# EAGLE board OOBDROID_V1 (EAGLE 7.2.0)

Size 60.3 x 36.38 mm. Coordinates in mm from the lower left corner, seen from the top.
Outline: 0.01,0.05 60.3,0 60.3,36.38 0,36.38
Copper layers (1*16): Top 0.035mm / dielectric 1.5mm / Bottom 0.035mm
Design rules "default": minimum track width 10mil, minimum drill 24mil, track to track 8mil, track to pad 8mil, pad to pad 8mil, via to via 8mil, smd to smd 8mil, copper to edge 40mil, drill to drill 8mil, minimum pad ring 10mil, minimum via ring 8mil, stop-mask expansion 4mil, vias tented up to drill 0mil, thermal gap 10mil

## Footprints (pad centres in the part's own frame; a part is rotated, then mirrored left to right if it is on the bottom)
C0805 = smd 1.3 x 1.5: 1 -0.95,0; 2 0.95,0
E1,8-4 = drill 0.711 pad 1.168: + -0.889,0 | drill 0.711 pad 1.168 octagon: - 0.889,0
DO214AA = smd 1.8 x 2.2: A 2.55,0; C -2.55,0
L4532P = smd 1.8 x 3.6: 1 -2,0; 2 2,0
DUOLED-C-5MM = drill 0.813 long: AR 2.54,0; AX -2.54,0; C 0,0
LED5MM = drill 0.813 pad 1.676 octagon: A -1.27,0; K 1.27,0
SSW-106-02-S-D = drill 1 pad 1.5 octagon: 1 -6.35,-1.27; 2 -6.35,1.27; 3 -3.81,-1.27; 4 -3.81,1.27; 5 -1.27,-1.27; 6 -1.27,1.27; 7 1.27,-1.27; 8 1.27,1.27; 9 3.81,-1.27; 10 3.81,1.27; 11 6.35,-1.27; 12 6.35,1.27
R0603 = smd 1 x 1.1: 1 -0.85,0; 2 0.85,0
SMT-0540-S-R = smd 1 x 1: + 1.7,-2.7; - 1.7,2.7; M -1.7,-2.7
TO263-5 = smd 1.067 x 2.159: 1 -3.404,-5.791; 2 -1.702,-5.791; 3 0,-5.791; 4 1.702,-5.791; 5 3.404,-5.791 | smd 10.8 x 10.41: 6 0,2.54
SOT23 = smd 1 x 1.4: 1 -0.95,-1.1; 2 0.95,-1.1; 3 0,1.1
SO08 = smd 0.61 x 2.21: 1 -1.905,-2.616; 2 -0.635,-2.616; 3 0.635,-2.616; 4 1.905,-2.616; 5 1.905,2.616; 6 0.635,2.616; 7 -0.635,2.616; 8 -1.905,2.616
SO18L = smd 0.66 x 2.032: 1 -5.08,-4.902; 2 -3.81,-4.902; 3 -2.54,-4.902; 4 -1.27,-4.902; 5 0,-4.902; 6 1.27,-4.902; 7 2.54,-4.902; 8 3.81,-4.902; 9 5.08,-4.902; 10 5.08,4.902; 11 3.81,4.902; 12 2.54,4.902; 13 1.27,4.902; 14 0,4.902; 15 -1.27,4.902; 16 -2.54,4.902; 17 -3.81,4.902; 18 -5.08,4.902
USB-A003 = smd 1.12 x 4: 1 -3.5,14; 2 -1,14; 3 1,14; 4 3.5,14 | hole 2.3: -6.57,10.28; 6.57,10.28
HC49 = drill 0.813 pad 1.8: 1 -2.413,0; 2 2.413,0
SSW-113-02-S-D = drill 1 pad 1.5 octagon: 1 -15.24,-1.27; 2 -15.24,1.27; 3 -12.7,-1.27; 4 -12.7,1.27; 5 -10.16,-1.27; 6 -10.16,1.27; 7 -7.62,-1.27; 8 -7.62,1.27; 9 -5.08,-1.27; 10 -5.08,1.27; 11 -2.54,-1.27; 12 -2.54,1.27; 13 0,-1.27; 14 0,1.27; 15 2.54,-1.27; 16 2.54,1.27; 17 5.08,-1.27; 18 5.08,1.27; 19 7.62,-1.27; 20 7.62,1.27; 21 10.16,-1.27; 22 10.16,1.27; 23 12.7,-1.27; 24 12.7,1.27; 25 15.24,-1.27; 26 15.24,1.27
SSW-120-02-S-S = drill 1 pad 1.5 octagon: 1 -24.13,0; 2 -21.59,0; 3 -19.05,0; 4 -16.51,0; 5 -13.97,0; 6 -11.43,0; 7 -8.89,0; 8 -6.35,0; 9 -3.81,0; 10 -1.27,0; 11 1.27,0; 12 3.81,0; 13 6.35,0; 14 8.89,0; 15 11.43,0; 16 13.97,0; 17 16.51,0; 18 19.05,0; 19 21.59,0; 20 24.13,0

## Placement (x,y rotation side)
C1  100nF  [C0805]  30.74,4.37 0 top
C2  100nF  [C0805]  30.74,6.91 0 top
C3  22pF  [C0805]  40.39,4.37 180 top
C4  22pF  [C0805]  35.57,4.37 0 top
C5  100nF  [C0805]  35.57,9.45 0 top
C6  100nF  [C0805]  40.39,9.45 180 top
C7  22pF  [C0805]  30.74,9.45 0 top
C8  22pF  [C0805]  35.57,6.91 0 top
C9  220µF  [E1,8-4]  35.31,14.79 270 top
C10  680µF  [E1,8-4]  40.14,14.79 270 top
D1  1N5824  [DO214AA]  55.13,5.9 180 top
L1  33µH  [L4532P]  47,5.9 180 top
LD2  [DUOLED-C-5MM]  3.82,32.82 90 top
LED_BLUE  [LED5MM]  3.82,25.45 0 top
OBD  OOBD-CON  [SSW-106-02-S-D]  57.67,17.07 90 top
R1  120R  [R0603]  23.12,14.79 270 top
R2  10k  [R0603]  20.84,14.79 270 top
R3  120R  [R0603]  18.55,14.79 90 top
R4  4k7  [R0603]  29.47,14.79 90 top
R5  10k  [R0603]  27.44,14.79 270 top
R6  82R  [R0603]  31.5,14.79 270 top
R7  82R  [R0603]  25.41,14.79 270 top
R8  4k7  [R0603]  8.9,28.5 0 top
R9  4k7  [R0603]  8.9,24.95 0 top
SPK1  SMT-0540-S-R  [SMT-0540-S-R]  3.82,4.63 0 top
STEPDOWN  LM2596S  [TO263-5]  49.03,15.8 0 top
T1  BC847  [SOT23]  13.22,28.25 90 top
T2  BC817  [SOT23]  13.22,24.44 90 top
U1  MCP2551  [SO08]  19.06,7.17 0 top
U2  MCP2551  [SO08]  24.9,7.17 180 top
U$1  MCP2515SO  [SO18L]  36.33,24.44 0 top
U$2  MCP2515SO  [SO18L]  22.11,24.44 0 top
USB1  [USB-A003]  0.01,14.79 270 top
X1  16MHz  [HC49]  52.59,33.33 180 top
X2  ODROID P1  [SSW-113-02-S-D]  25.41,33.84 0 top
X3  16MHz  [HC49]  52.59,27.99 0 top
X4  ODROID-P5  [SSW-120-02-S-S]  34.3,1.32 0 top

## Library data of the parts
C1-C8 = eagle-ltspice; SPICEMODEL: NONE; SPICEPREFIX: C
C9 C10 = resistor
D1 = diode
L1 = eagle-ltspice; SPICEMODEL: NONE; SPICEPREFIX: L
LD2 = led
LED_BLUE SPK1 = adafruit
OBD = con-samtec; MPN: SSW-106-02-S-D; OC_FARNELL: unknown; OC_NEWARK: 11P9414
R1-R9 = eagle-ltspice; SPICEMODEL: NONE; SPICEPREFIX: R
STEPDOWN = national-semiconductor; MF: NATIONAL SEMICONDUCTOR; MPN: LM2596S-ADJ/NOPB; OC_FARNELL: 9494367; OC_NEWARK: 41K3842
T1 T2 = transistor
U1 U2 = SparkFun
U$1 U$2 = MCP2515_MT
USB1 = con-yamaichi; OC_FARNELL: unknown; OC_NEWARK: unknown
X1 X3 = IQD-Frequency-Products
X2 = con-samtec; MPN: SSW-113-02-S-D; OC_FARNELL: unknown; OC_NEWARK: 11P9530
X4 = con-samtec; MPN: SSW-120-02-S-S; OC_FARNELL: unknown; OC_NEWARK: 11P9641

## Nets
GND: C1.2 C2.2 C3.1 C4.1 C5.2 C6.2 C7.1 C8.1 C9.- C10.- D1.A LD2.C OBD.4 STEPDOWN.3 STEPDOWN.5 T1.2 T2.2 U1.2 U1.8 U2.2 U2.8 U$1.9 U$2.9
N$1: OBD.5 R1.1 U1.7
N$2: D1.C L1.1 STEPDOWN.2
N$3: C8.2 U$2.7 X3.2
N$4: C9.+ L1.2 STEPDOWN.4
N$5: C7.2 U$2.8 X3.1
N$6: R5.2 U$2.17
N$7: U2.4 U$2.2
N$8: U2.1 U$2.1
N$9: OBD.3 R3.2 U2.6
N$10: OBD.1 R3.1 U2.7
N$11: C4.2 U$1.7 X1.2
N$12: C3.2 U$1.8 X1.1
N$13: R2.2 U$1.17
N$14: U1.4 U$1.2
N$15: U1.1 U$1.1
N$16: OBD.7 R1.2 U1.6
N$18: LED_BLUE.K R9.1
N$19: U$1.16 X2.26
N$20: SPK1.+ T1.3
N$21: R4.2 T1.1
N$22: LD2.AR R6.2
N$23: LD2.AX R7.1
N$24: R7.2 X2.15
N$25: R6.1 X2.13
N$26: USB1.1 X4.1
N$27: USB1.4 X4.2
N$28: USB1.2 X4.3
N$29: USB1.3 X4.4
N$30: R4.1 X2.11
N$31: U$1.12 X2.22
N$32: U$2.12 X2.18
N$33: U$2.16 X2.24
N$34: R9.2 T2.3
N$35: R8.1 T2.1
N$36: R8.2 X2.8
N$38: U$1.14 U$2.14 X2.19
N$43: U$1.15 U$2.15 X2.21
N$44: U$1.13 U$2.13 X2.23
VCC: C1.1 C2.1 C5.1 C6.1 C10.+ LED_BLUE.A OBD.2 R2.1 R5.1 SPK1.- STEPDOWN.1 U1.3 U2.3 U$1.18 U$2.18

## Tracks (layer width: path | path; a pad name or v marks a point on that pad's centre or on a via)
GND  (22 unrouted)
N$1  (2 unrouted)
N$2  (2 unrouted)
N$3  (2 unrouted)
N$4  (2 unrouted)
N$5  (2 unrouted)
N$6  (1 unrouted)
N$7  (1 unrouted)
N$8  (1 unrouted)
N$9  (2 unrouted)
N$10  (2 unrouted)
N$11  (2 unrouted)
N$12  (2 unrouted)
N$13  (1 unrouted)
N$14  (1 unrouted)
N$15  (1 unrouted)
N$16  (2 unrouted)
N$18  (1 unrouted)
N$19  (1 unrouted)
N$20  (1 unrouted)
N$21  (1 unrouted)
N$22  (1 unrouted)
N$23  (1 unrouted)
N$24  (1 unrouted)
N$25  (1 unrouted)
N$26  (1 unrouted)
N$27  (1 unrouted)
N$28  (1 unrouted)
N$29  (1 unrouted)
N$30  (1 unrouted)
N$31  (1 unrouted)
N$32  (1 unrouted)
N$33  (1 unrouted)
N$34  (1 unrouted)
N$35  (1 unrouted)
N$36  (1 unrouted)
N$38  (2 unrouted)
N$43  (2 unrouted)
N$44  (2 unrouted)
VCC  (14 unrouted)